# EAGLE board n64rgb2moutfilter (EAGLE 9.5.2)
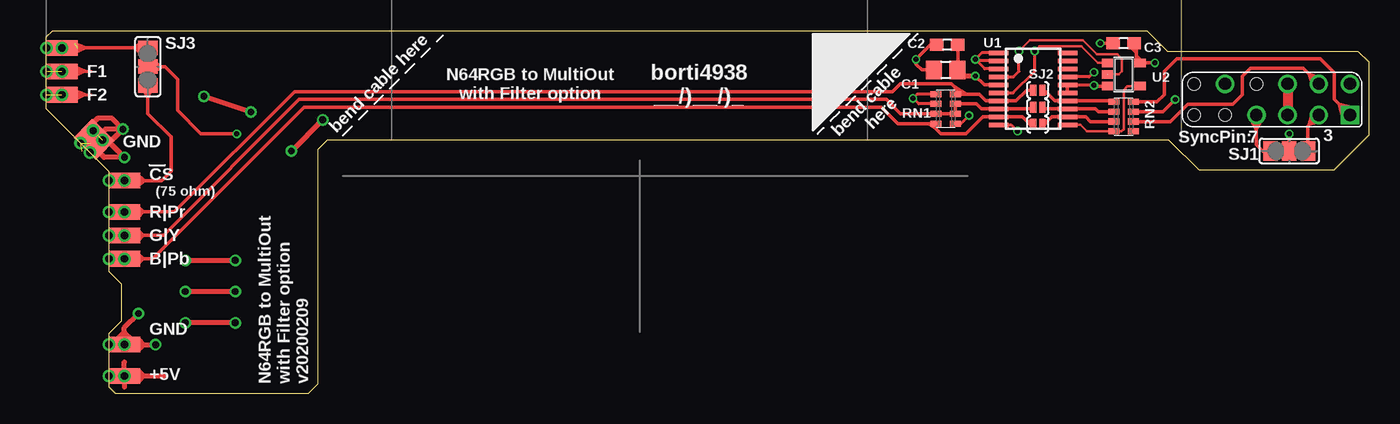
[diagram p0: board, top side]
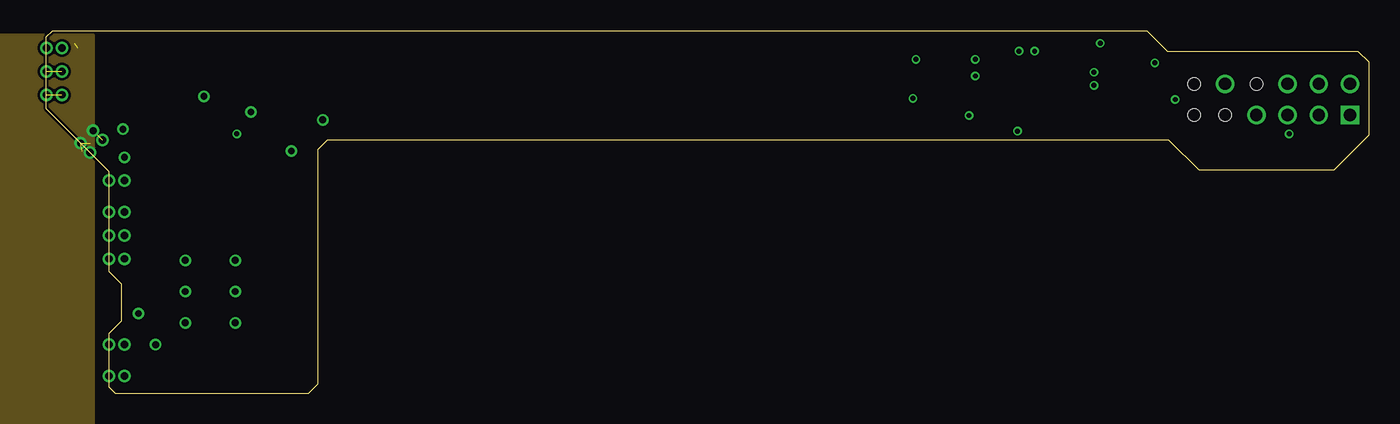
[diagram p1: board, inner layer Route2]
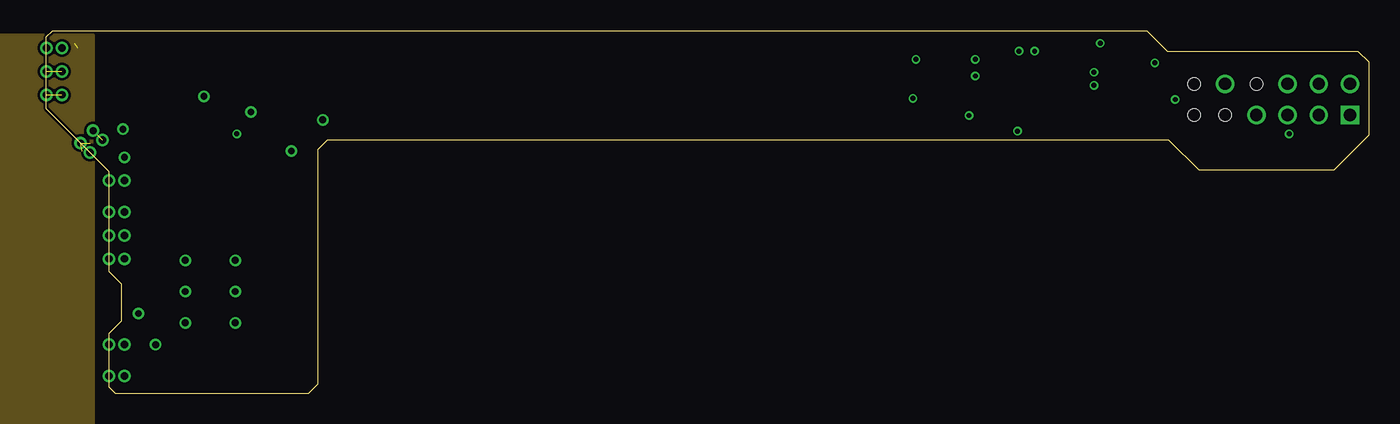
[diagram p2: board, inner layer Route15]
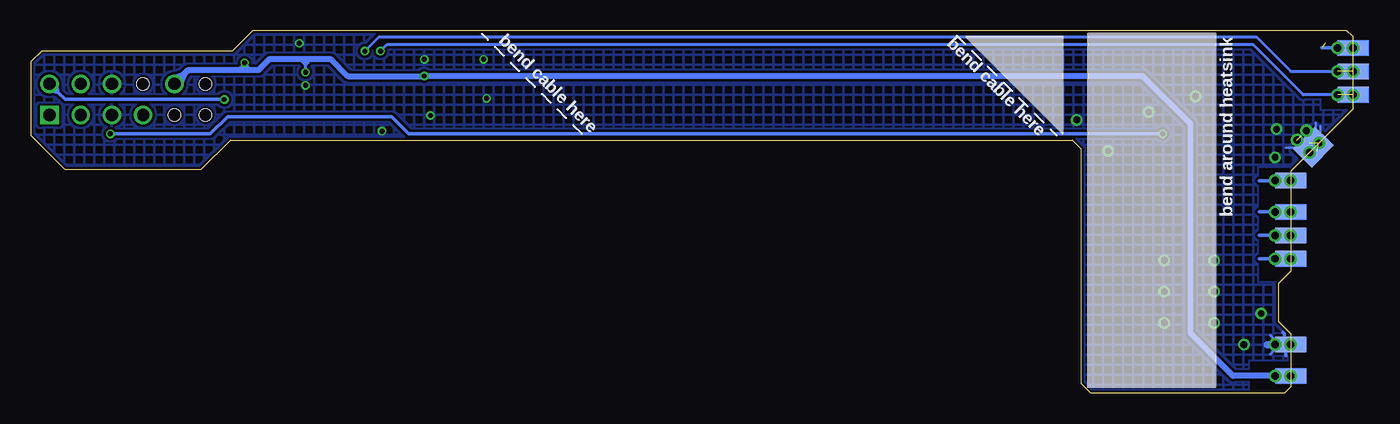
[diagram p3: board, bottom side, seen from below]

Size 107.57 x 29.46 mm. Coordinates in mm from the lower left corner, seen from the top.
Outline: 0,23.11 5.08,18.03 5.08,9.91 6.1,8.89 6.1,5.84 5.08,4.83 5.08,0.51 5.59,0 21.34,0 22.1,0.76 22.1,19.81 22.86,20.57 91.31,20.57 93.73,18.16 104.78,18.16 107.57,20.96 107.57,26.92 106.68,27.81 91.19,27.81 89.53,29.46 0.51,29.46 0,28.96 0,23.11
Copper layers (1*16): Top 0.018mm / dielectric 1.55mm / Bottom 0.018mm
Design rules "fpc": minimum track width 0.1mm, minimum drill 0.2mm, track to track 0.2mm, track to pad 0.2mm, pad to pad 0.2mm, via to via 0.2mm, smd to smd 0mil, copper to edge 0.2mm, drill to drill 0.2mm, minimum pad ring 0.125mm, minimum via ring 0.1mm, stop-mask expansion 2mil, vias tented up to drill 1mm, thermal gap 0.2mm
bRestrict: area 5.1,-0.3 to 8.4,2.5; area 5.1,9.1 to 7.6,18.3; area 0,23.1 to 2.5,32.3

## Footprints (pad centres in the part's own frame; a part is rotated, then mirrored left to right if it is on the bottom)
SMD1,27-2,54 = smd 1.27 x 2.54: 1 0,0
C0805 = smd 1.3 x 1.5: 1 -0.95,0; 2 0.95,0
C0603 = smd 1.1 x 1: 1 -0.85,0; 2 0.85,0
SNES_MULTIAV_RGBSY = drill 1 square: 1 6.35,-1.27 | drill 1: 2 6.35,1.27; 3 3.81,-1.27; 4 3.81,1.27; 5 1.27,-1.27; 6 1.27,1.27; 7 -1.27,-1.27; 10 -3.81,1.27 | hole 1: -3.81,-1.27; -6.35,-1.27; -6.35,1.27; -1.27,1.27
CTS742C083 = smd 0.5 x 0.9: 1 -1.2,-0.8; 2 -0.4,-0.8; 3 0.4,-0.8; 4 1.2,-0.8; 5 1.2,0.8; 6 0.4,0.8; 7 -0.4,0.8; 8 -1.2,0.8
SJ_2 = smd 1.168 x 1.6: 1 -1.524,0; 2 0,0; 3 1.524,0
SJ_SMALL = smd 0.508 x 0.889: 1 -0.381,0; 2 0.381,0
THS7368 = smd 1.6 x 0.35: 1 -2.8,2.895; 2 -2.8,2.245; 3 -2.8,1.595; 4 -2.8,0.945; 5 -2.8,0.295; 6 -2.8,-0.355; 7 -2.8,-1.005; 8 -2.8,-1.655; 9 -2.8,-2.305; 10 -2.8,-2.955; 11 2.8,-2.955; 12 2.8,-2.305; 13 2.8,-1.655; 14 2.8,-1.005; 15 2.8,-0.355; 16 2.8,0.295; 17 2.8,0.945; 18 2.8,1.595; 19 2.8,2.245; 20 2.8,2.895
SOT23-5 = smd 0.69 x 0.99: 1 -0.95,-1.29; 2 0,-1.29; 3 0.95,-1.29; 4 0.95,1.3; 5 -0.95,1.3

## Placement (x,y rotation side)
B/PB  [SMD1,27-2,54]  6.35,10.92 90 top
B/PB1  [SMD1,27-2,54]  5.08,10.92 90 bottom
C1  22u  [C0805]  73.15,26.29 0 top
C2  0.1u  [C0603]  73.28,28.32 180 top
C3  0.1u  [C0603]  87.63,28.45 180 top
CS75#  [SMD1,27-2,54]  6.35,17.27 90 top
CS75#1  [SMD1,27-2,54]  5.08,17.27 90 bottom
CS#  [SMD1,27-2,54]  0,28.07 90 bottom
CS#1  [SMD1,27-2,54]  1.27,28.07 90 top
E$1  [SNES_MULTIAV_RGBSY]  99.69,23.88 0 top
F1  [SMD1,27-2,54]  0,26.16 90 bottom
F2  [SMD1,27-2,54]  0,24.26 90 bottom
F3  [SMD1,27-2,54]  1.27,24.26 90 top
F4  [SMD1,27-2,54]  1.27,26.16 90 top
G/Y  [SMD1,27-2,54]  6.35,12.83 90 top
G/Y1  [SMD1,27-2,54]  5.08,12.83 90 bottom
P_GND1  [SMD1,27-2,54]  5.08,3.94 90 bottom
P_GND2  [SMD1,27-2,54]  6.35,3.94 90 top
P_GND3  [SMD1,27-2,54]  4.19,20.96 45 top
P_GND4  [SMD1,27-2,54]  3.56,20.32 45 top
P_GND5  [SMD1,27-2,54]  2.92,19.69 315 bottom
P_GND6  [SMD1,27-2,54]  3.56,20.32 315 bottom
P_VCC_5V  [SMD1,27-2,54]  6.35,1.4 90 top
P_VCC_5V1  [SMD1,27-2,54]  5.08,1.4 90 bottom
R/PR  [SMD1,27-2,54]  6.35,14.73 90 top
R/PR1  [SMD1,27-2,54]  5.08,14.73 90 bottom
RN1  75  [CTS742C083]  73.15,23.11 90 top
RN2  75  [CTS742C083]  87.63,22.48 270 top
SJ1  [SJ_2]  101.09,19.69 180 top
SJ2B  [SJ_SMALL]  80.64,24.64 0 top
SJ2G  [SJ_SMALL]  80.64,23.24 0 top
SJ2R  [SJ_SMALL]  80.64,21.84 0 top
SJ3  [SJ_2]  8.26,26.54 270 top
U1  [THS7368]  80.26,24.77 0 top
U2  [SOT23-5]  87.63,25.91 270 top

## Library data of the parts
B/PB B/PB1 CS75# CS75#1 CS# CS#1 F1-F4 G/Y G/Y1 P_GND1-P_GND3 P_VCC_5V P_VCC_5V1 R/PR R/PR1 = wirepad@1
C1-C3 = rcl
E$1 U1 = snes_div
P_GND4-P_GND6 = wirepad
RN1 RN2 = resistor-net
SJ1 SJ2B SJ2G SJ2R SJ3 = jumper
U2 = 74xx-little-de

## Nets
5V: C1.2 C2.1 C3.1 E$1.10 P_VCC_5V1.1 P_VCC_5V.1 U1.5 U1.17 U2.5
#CS: E$1.3 SJ1.1
#CS.75.I: CS75#1.1 CS75#.1 SJ3.3
#CS.I: CS#1.1 CS#.1 SJ3.1
#CS.SEL: SJ1.2 SJ3.2
BLUE: B/PB1.1 B/PB.1 RN1.8 SJ2R.1 U1.9
BLUE.OUT: RN2.3 SJ2R.2 U1.12
BLUE.OUT.75: E$1.4 RN2.6
BYPASS_SF: RN2.4 U1.11 U2.4
F1: F1.1 F4.1 U1.6 U2.1
F2: F2.1 F3.1 U1.4 U2.2
GND: C1.1 C2.2 C3.2 E$1.5 E$1.6 P_GND1.1 P_GND2.1 P_GND3.1 P_GND4.1 P_GND5.1 P_GND6.1 RN1.1 RN1.5 RN1.6 U1.1 U1.2 U1.3 U1.10 U1.15 U1.16 U2.3
GREEN: G/Y1.1 G/Y.1 RN1.2 RN1.3 RN1.7 SJ2G.1 U1.8
GREEN.OUT: RN2.2 SJ2G.2 U1.13
GREEN.OUT.75: E$1.2 RN2.7
LUMA: E$1.7 SJ1.3
RED: R/PR1.1 R/PR.1 RN1.4 SJ2B.1 U1.7
RED1.OUT: RN2.1 SJ2B.2 U1.14
RED.OUT.75: E$1.1 RN2.8

## Tracks (layer width: path | path; a pad name or v marks a point on that pad's centre or on a via)
5V  (via drill 0.4, 0.6)
  Top 0.254: v85.22,26.09 84.84,25.71 U1.17
  Top 0.305: C1.2 74.1,26.47 74.13,26.5 C2.1 | U1.5 76.29,25.06 v75.56,25.78 | v90.17,26.85 U2.5 88.65,27.14 88.65,27.43 | C3.1 88.65,28.28 88.65,27.69 | 88.65,27.43 88.65,27.69 | 88.65,27.69 88.14,28.19 | 88.65,27.43 89.15,26.92
  Top 0.406: P_VCC_5V.1 7.87,1.4 | 7.49,1.78 7.87,1.4 | 7.87,1.4 7.49,1.02 | 5.48,1.4 P_VCC_5V.1 | 7.87,1.4 9.53,1.4 | P_VCC_5V.1 6.35,2.54 | P_VCC_5V.1 6.35,0.51 | v75.56,25.78 74.61,25.78 C1.2
  Bottom 0.254: 85.22,26.67 85.22,27.18 | 85.22,26.67 84.71,27.18 | v85.22,26.09 85.22,26.67 | 85.22,26.67 85.72,27.18
  Bottom 0.305: 94.87,26.16 95.38,24.89 | 95,26.04 96.14,25.65 | 89.66,26.29 90.17,26.8 90.68,26.29 | v90.17,26.85 90.17,26.29
  Bottom 0.406: P_VCC_5V1.1 P_VCC_5V.1
  Bottom 0.508: P_VCC_5V.1 9.78,1.4 13.21,4.83 13.21,21.84 17.14,25.78 v75.56,25.78 81.79,25.78 83.19,27.18 84.71,27.18 85.22,27.18 85.72,27.18 88.14,27.18 89.03,26.29 89.66,26.29 90.17,26.29 90.68,26.29 94.74,26.29 94.87,26.16 95,26.04 E$1.10
  other vias: 5.08,1.4 6.35,1.4
#CS
  Top 0.254: 103.76,22.1 102.74,21.84 103,22.86
  Top 0.305: E$1.3 102.74,21.84 102.62,21.72 SJ1.1
#CS.75.I  (via drill 0.6)
  Top 0.305: CS75#1.1 CS75#.1 8,17.27 | 8,17.27 9.4,17.27 10.16,18.03 10.16,20.83 8.26,22.73 8.26,24.13 | 8,17.27 7.49,17.65 | 8,17.27 7.49,16.89 | 8.26,24.13 SJ3.3 | 8.26,24.13 8.76,24.89 | 8.26,24.13 7.75,24.89
  Bottom 0.305: CS75#1.1 7.62,17.27
  other vias: 5.08,17.27 6.35,17.27
#CS.I  (via drill 0.6)  (1 unrouted)
  Top 0.254: CS#1.1 3.17,28.07
  Top 0.305: 3.17,28.07 2.29,27.69 | 3.17,28.07 2.29,28.45 | 3.17,28.07 7.11,28.07 | 7.11,28.07 SJ3.1 | 7.11,28.07 7.62,28.45 | 7.11,28.07 7.62,27.69
  Bottom 0.203: -0.36,27.71 CS#.1
  Bottom 0.305: CS#.1 2.54,28.07
  other vias: 0,28.07 1.27,28.07
#CS.SEL  (via drill 0.4)
  Top 0.305: SJ1.2 v101.09,21.08 | v15.49,21.08 12.57,21.08 10.67,22.99 10.67,25.53 9.65,26.54 9.4,26.54 | 9.4,26.54 SJ3.2 | 9.4,26.54 8.76,26.16 | 9.4,26.54 8.76,26.92
  Bottom 0.305: v101.09,21.08 92.96,21.08 91.57,22.48 78.23,22.48 76.83,21.08 v15.49,21.08
+5V
  pour Route15 (rank 3): -22.86,29.08 -22.86,24.26 -22.1,23.5 -17.02,23.5 -16.51,22.99 -16.51,17.4 -16,16.89 -14.22,16.89 -9.14,11.81 -9.14,8.76 -9.65,8.25 -13.21,8.25 -13.72,7.75 -13.72,1.91 -13.21,1.4 -7.37,1.4 -6.86,0.89 -6.86,-2.92 -6.1,-3.68 3.81,-3.68 3.81,29.08
BLUE  (via drill 0.6)
  Top 0.254: 80.26,22.1 SJ2R.1
  Top 0.305: 7.87,10.92 B/PB.1 B/PB1.1 | 7.49,11.3 7.87,10.92 | 7.87,10.92 7.49,10.54 | 7.87,10.92 8.64,10.92 20.95,23.24 67.94,23.24 69.27,21.91 71.75,21.91 | 79.76,22.1 79.39,22.46 U1.9 76.18,22.46 74.8,21.08 72.77,21.08 72.35,21.5 | 79.76,22.1 80.26,22.1 | 71.75,21.91 RN1.8 72.35,21.5 | 71.75,21.91 72.35,21.5 | 79.76,22.1 80.26,21.59
  Bottom 0.305: B/PB1.1 7.62,10.92
  other vias: 5.08,10.92 6.35,10.92
BLUE.OUT
  Top 0.254: 81.03,22.1 SJ2R.2 | 81.41,22.1
  Top 0.305: 81.41,22.1 81.78,22.46 U1.12 84.54,22.46 84.92,22.08 RN2.3 | 81.03,22.1 81.41,22.1 81.03,21.59
BLUE.OUT.75
  Top 0.305: 102.74,25.91 102.23,26.42 97.92,26.42 97.28,25.78 97.28,24.26 96.52,23.5 92.84,23.5 91.42,22.08 RN2.6 | 102.74,25.91 E$1.4 | 102.74,25.91 103.89,25.53 | 102.74,25.91 103.12,24.77
BYPASS_SF
  Top 0.203: U1.11 84.11,21.81 84.64,21.28 RN2.4 87.45,21.28 87.63,21.46 87.63,24.64 87.95,24.96 U2.4
F1  (via drill 0.4, 0.6)  (1 unrouted)
  Top 0.203: v80.39,27.81 80.77,28.19 84.2,28.19 85.54,26.86 U2.1
  Top 0.254: F4.1 2.67,26.16 | 2.67,26.16 3.17,26.16 | 3.17,26.16 2.29,25.78 | 3.17,26.16 2.29,26.54 | U1.6 78.64,24.41 80.39,26.16 v80.39,27.81 | 3.17,26.16 3.68,26.16 | 2.67,26.16 2.54,26.04 2.54,26.29
  Bottom 0.254: v80.39,27.81 79.25,28.96 7.87,28.96 5.08,26.16 F1.1
  other vias: 0,26.16
F2  (via drill 0.4, 0.6)  (1 unrouted)
  Top 0.203: v79.12,27.81 80.01,28.7 84.33,28.7 85.47,27.56 87.12,27.56 87.5,27.18 87.5,26.16 87.25,25.91 U2.2
  Top 0.254: F3.1 2.67,24.26 | 2.67,24.26 3.17,24.26 | 3.17,24.26 2.29,24.64 | 3.17,24.26 2.41,23.88 | 3.17,24.26 3.68,24.26 | 2.67,24.26 2.54,24 | 2.67,24.26 2.54,24.38 | 78.16,25.71 U1.4 78.67,25.71 79.12,26.16 v79.12,27.81
  Bottom 0.254: v79.12,27.81 78.61,28.32 8.13,28.32 4.06,24.26 F2.1
  other vias: 0,24.26
GND  (via drill 0.4, 0.55, 0.6)  (3 unrouted)
  Top 0.254: v75.56,27.14 75.69,27.01 U1.2 | U1.1 76.09,27.66 v75.56,27.14 | U1.3 76.34,26.36 v75.56,27.14 | U1.10 78.49,21.81 v78.99,21.3 | RN1.1 74.4,21.91 v75.06,22.57 | RN1.5 70.83,24.31 70.5,23.99 | 70.5,23.99 v70.48,23.97 | RN1.6 70.97,23.51 70.5,23.99 | v85.22,25.02 85.18,25.06 U1.16
  Top 0.305: P_GND2.1 P_GND1.1 | C2.2 71.92,28.32 v70.74,27.14 70.74,26.76 71.21,26.29 C1.1 | U1.16 U1.15 | U2.3 85.28,24.96 v85.22,25.02 | v85.72,28.45 C3.2
  Top 0.406: 7.87,3.94 P_GND2.1 6.35,4.95 | 7.87,3.94 v8.89,3.94 | 6.35,4.95 6.35,5.33 v7.49,6.48 | 6.35,4.95 6.99,4.32 | 6.35,4.95 5.71,4.32 | 7.49,4.32 7.87,3.94 | 7.87,3.94 7.49,3.56 | v6.22,21.46 4.83,21.46 4.57,21.21 v4.57,20.57 | 3.68,20.19 4.7,19.18 v6.35,19.18 4.95,20.57 | 3.68,20.19 P_GND6.1 4.32,20.32 v4.57,20.57 | 4.95,20.57 v4.57,20.57 | v6.22,21.46 5.33,20.57 4.95,20.57 | v6.22,21.46 5.36,22.33 4.17,22.33 3.68,21.84 3.68,20.19 | v11.3,10.79 v15.37,10.79 | v15.37,8.25 v11.3,8.25 | v15.37,5.71 v11.3,5.71 | v22.48,22.23 v19.94,19.69 | v12.83,24.13 v16.64,22.86
  Top 0.813: E$1.6 E$1.5
  Bottom 0.203: 2.67,21.72 2.67,21.21 3.05,20.83 | 3.05,20.83 P_GND6.1 | 5.46,19.94 3.94,19.94 P_GND6.1 | P_GND6.1 3.56,21.46 3.68,21.59 | 4.83,20.32 P_GND6.1 | 3.05,20.83 3.05,21.97
  Bottom 0.254: 6.73,4.7 6.35,4.32 P_GND2.1 6.35,3.56 6.73,3.17
  Bottom 0.305: P_GND2.1 5.59,3.94 | 5.59,3.94 5.59,4.83 5.71,4.95 | 5.59,3.94 5.46,3.81 5.46,3.05
  Bottom 0.406: v4.57,20.57 3.94,19.94 | P_GND5.1 3.43,19.69 v3.56,19.56
  Bottom 0.61: P_GND2.1 6.99,3.94
  other vias: 5.08,3.94 6.35,3.94 2.79,20.32 3.81,21.34
  pour Route2 (rank 2): -62.23,-9.02 3.81,-9.02 3.81,29.08 -62.23,29.08
  pour Bottom (hatched): 0,29.46 107.7,29.46 107.7,17.53 22.1,17.53 22.1,0 5.08,0 5.08,18.03 0,23.11
GREEN  (via drill 0.6)
  Top 0.305: 7.87,12.83 G/Y.1 G/Y1.1 | 7.49,12.45 7.87,12.83 | 7.49,13.21 7.87,12.83 | 7.87,12.83 9.53,12.83 20.57,23.88 68.33,23.88 69.49,22.71 RN1.7 RN1.2 RN1.3 75.67,23.51 76.08,23.11 U1.8 80.13,23.11 SJ2G.1
  Bottom 0.305: G/Y1.1 7.62,12.83
  other vias: 5.08,12.83 6.35,12.83
GREEN.OUT
  Top 0.305: SJ2G.2 81.03,23.11 U1.13 85.33,23.11 85.56,22.88 RN2.2
GREEN.OUT.75  (via drill 0.4)
  Top 0.305: v91.82,23.88 90.82,22.88 RN2.7
  Bottom 0.254: 106.3,24.64 105.28,24.38 105.54,25.4
  Bottom 0.305: E$1.2 105.28,24.38 104.78,23.88 v91.82,23.88
LUMA
  Top 0.254: 97.92,22.35 98.42,21.46 98.93,22.35
  Top 0.305: E$1.7 98.42,21.46 98.42,20.19 98.93,19.69 SJ1.3
RED  (via drill 0.6)
  Top 0.305: 7.87,14.73 R/PR.1 R/PR1.1 | 7.49,14.35 7.87,14.73 | 7.87,14.73 7.49,15.11 | U1.7 76.82,23.76 | 7.87,14.73 10.41,14.73 20.19,24.51 68.83,24.51 69.47,25.15 73.63,25.15 73.9,24.88 | U1.7 78.88,23.76 79.76,24.64 SJ2B.1 | 73.9,24.88 73.95,24.82 RN1.4 74.8,24.31 | U1.7 76.44,23.76 75.89,24.31 74.8,24.31 | 73.9,24.88 74.8,24.31
  Bottom 0.305: R/PR1.1 7.62,14.73
  other vias: 5.08,14.73 6.35,14.73
RED1.OUT
  Top 0.305: 81.41,24.38 82.03,23.76 U1.14 86.75,23.76 RN2.1 | 81.41,24.38 81.03,24.38 SJ2B.2 | 81.41,24.38 81.03,24.77
RED.OUT.75
  Top 0.305: 105.16,23.5 104.78,23.88 104.78,26.04 103.63,27.18 91.95,27.18 90.93,26.16 90.93,24.28 90.33,23.68 RN2.8 | 105.16,23.5 E$1.1 | 105.16,23.5 106.55,23.11 | 105.16,23.5 105.54,22.1
S$2  (via drill 0.6)
  other vias: 1.27,26.16
S$3  (via drill 0.6)
  other vias: 1.27,24.26
VCCIO
  pour Route15 (rank 4): -52.45,29.08 -52.45,24.26 -49.28,24.26 -49.28,29.08 3.81,29.08 3.81,-9.02 -62.23,-9.02 -62.23,29.08

## Text on the board
tPlace: bend cable / here | bend cable here
bPlace: bend cable here | bend cable here
tNames: F1 | SJ2 | N64RGB to MultiOut / with Filter option | borti4938 / __/)__/)_ | F2 | 3 | GND | SyncPin: | 7 | CS | (75 ohm) | R|Pr | G|Y | B|Pb | GND | +5V | N64RGB to MultiOut / with Filter option / v20200209
bNames: bend around heatsink
tDocu: Configuration without Filter: / - close SJ2 / - parts: / o C1: 22uF, SMD0805 (optional) / o RN2: 4x0ohm, SMD1206 / - N64Adv board: leave J1.1 open | Configuration with Filter: / - leave SJ2 open / - parts: / o U1: THS7368, TSSOP20 / o U2: SN74LVC1G08DBV, SOT23-5 / o C1: 22uF, SMD0805 / o C2, C3: 0.1uF, SMD0603 / o RN1,RN2: 4x75ohm, SMD1206 / - N64Adv board: close J1.1 | Flex-PCB (c) 2019, 2020 Peter Bartmann